# Altium PCB BridgeThing.PcbDoc
Units mm, origin at the board's own origin, x right, y up, seen from the top; angles counter-clockwise.
Board outline 65.45 x 56.45 mm, 2 copper layers (Top Layer, Bottom Layer); 62 components, 69 nets, 250 pads, 258 vias.
Unrouted connection lines stored in the file: 2.
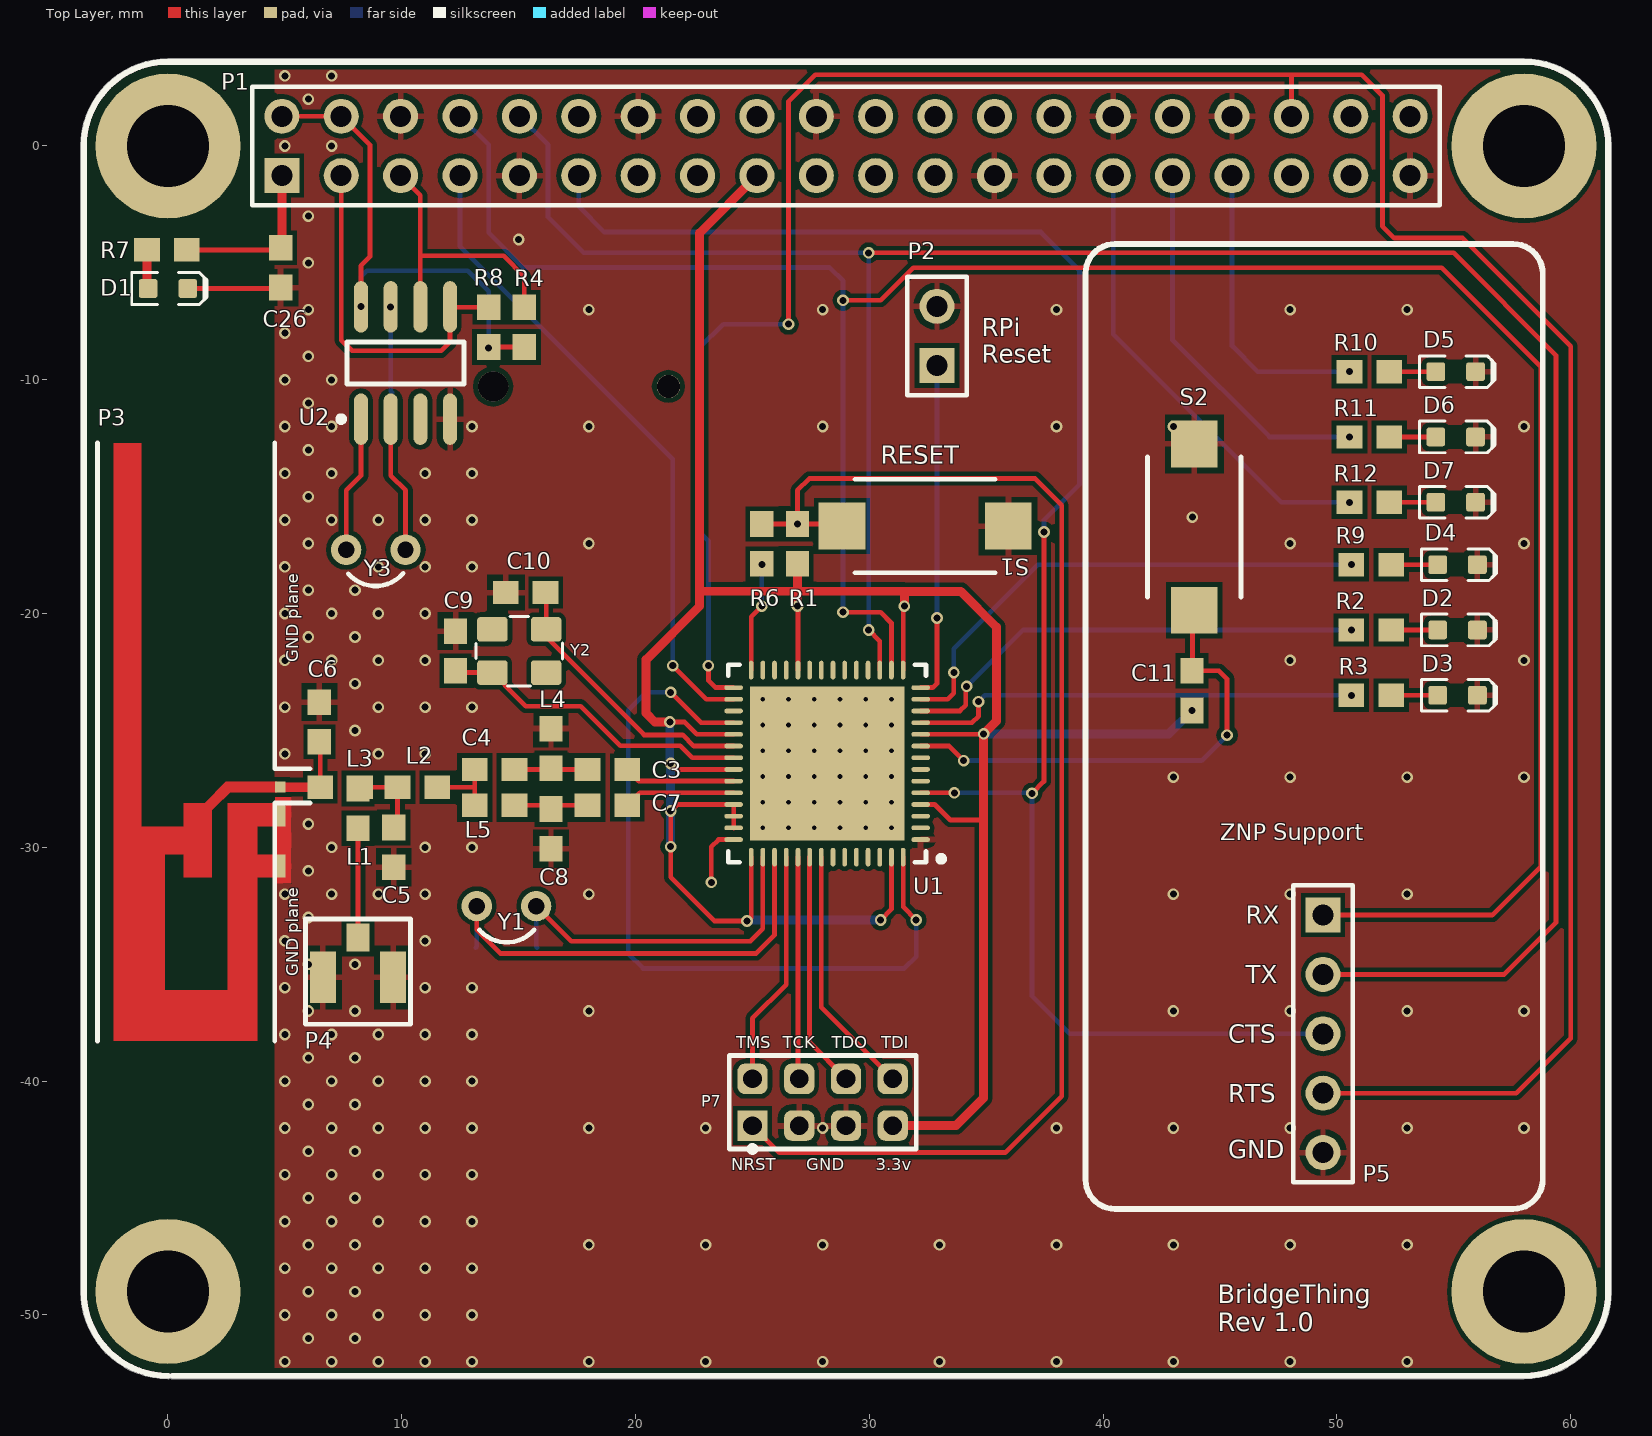
[diagram p0: Top Layer view]
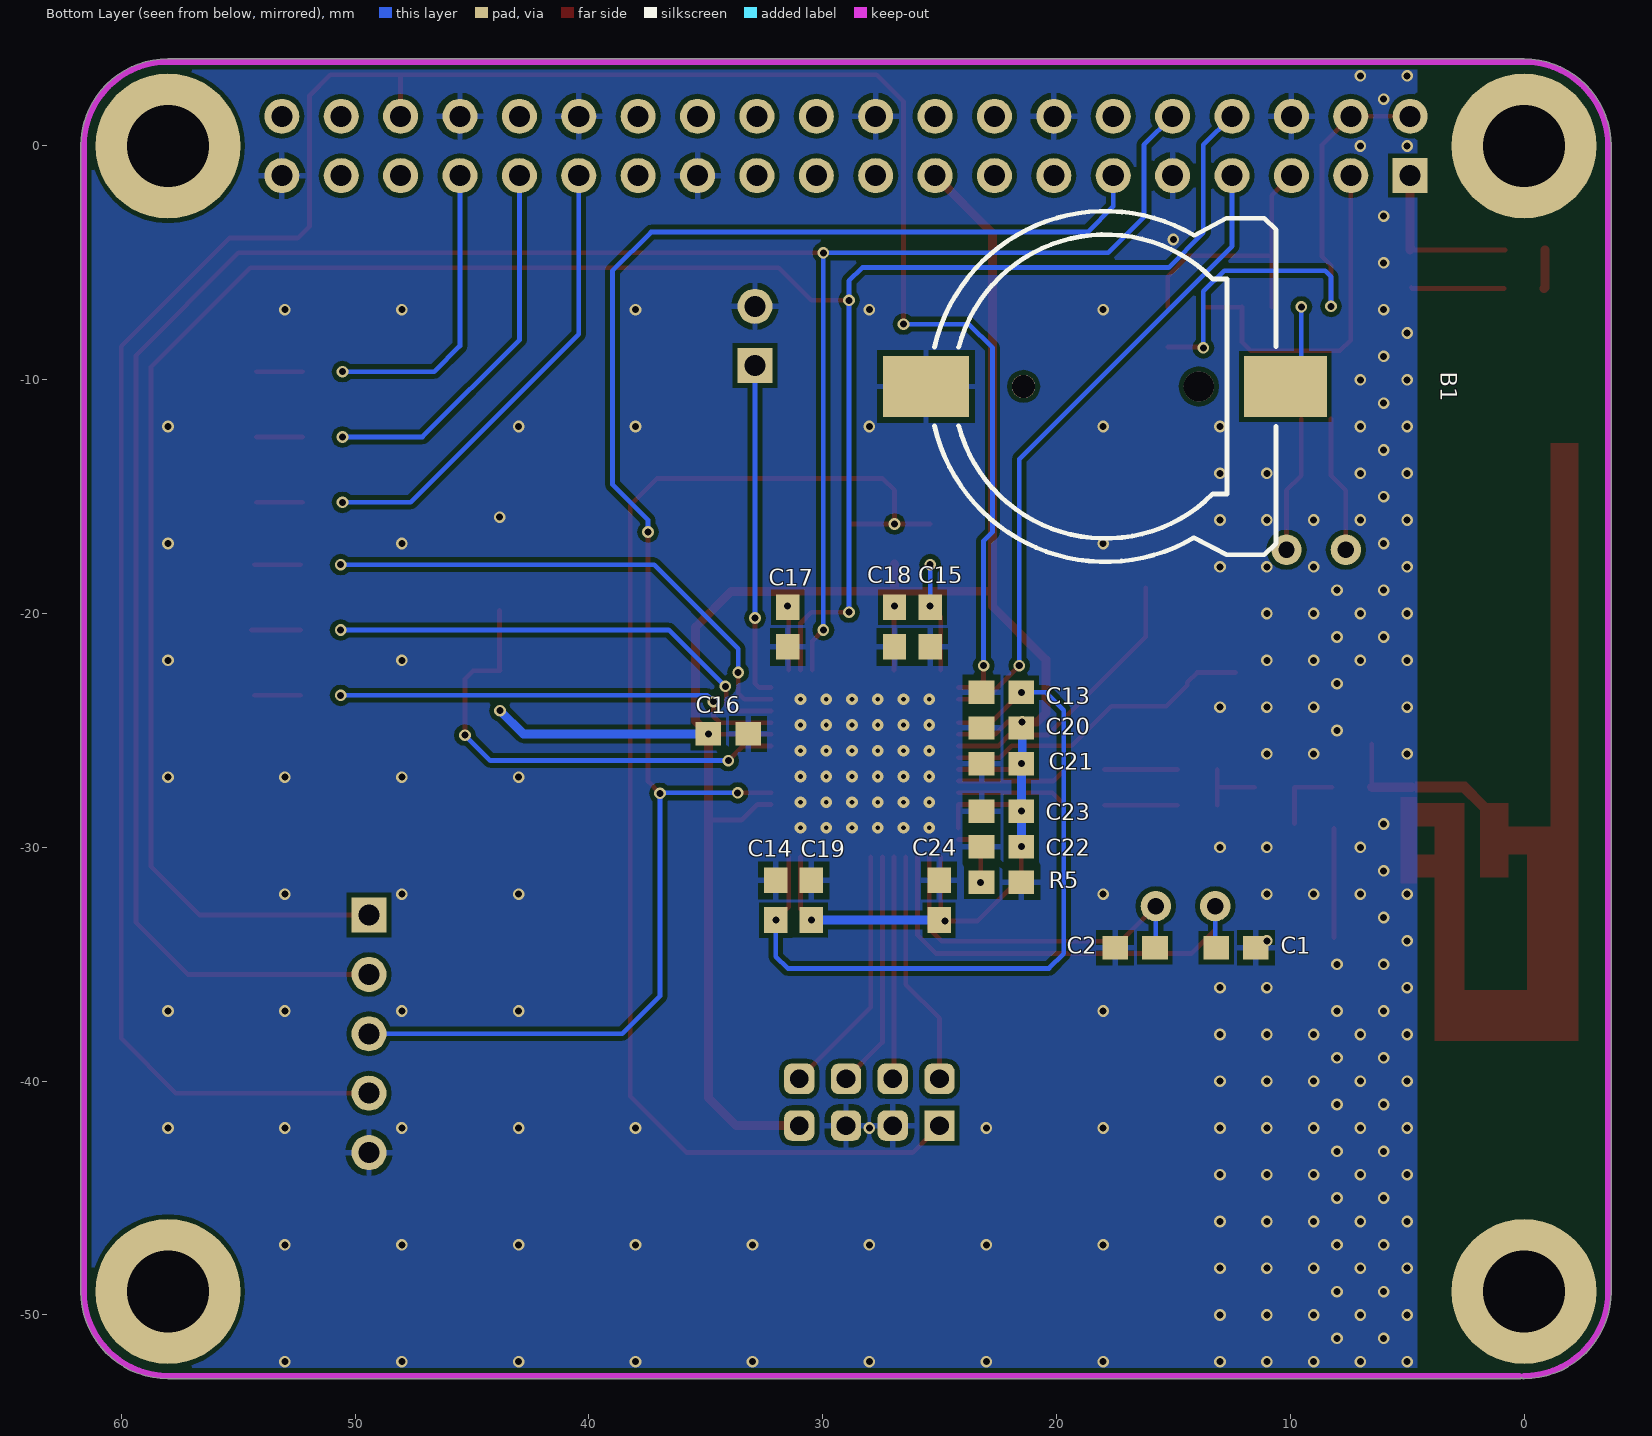
[diagram p1: Bottom Layer view, seen from below]

## Layer stack, top to bottom
Top Solder: solder mask 0.0102, Solder Resist, Dk 3.5
Top Layer: signal copper 0.0356
Dielectric 1: dielectric 0.32, FR-4, Dk 4.8
Bottom Layer: signal copper 0.0356
Bottom Solder: solder mask 0.0102, Solder Resist, Dk 3.5

## Board outline
-3.727,-49.001 cw(c-3.6,-49) -3.727,-49 -3.727,0 cw(c-3.6,0) -3.727,0.001 cw(c0,0) 0,3.727 58,3.727 cw(c58,0) 61.727,0.001 cw(c61.6,0) 61.727,0 61.727,-49 cw(c61.6,-49) 61.727,-49.001 ccw(c58,-49) 61.727,-49 ccw(c61.6,-49) 61.727,-49 61.727,-49.001 cw(c58,-49) 58,-52.727 0.201,-52.727 cw(c0.2,-52.6) 0.1,-52.679 ccw(c0,-52.6) 0.1,-52.679 cw(c0,-52.6) 0,-52.727 cw(c0,-49)

## Design rules (kind name [scope] priority, off if disabled: settings)
Clearance [All] p1: gap=0.2 ignorepadtopadclearanceinfootprint=FALSE except(0: Arc-Hole Track-Hole SMDPad-Hole THPad-Hole Via-Hole Fill-Hole Poly-Hole Region-Hole Text-Hole)
PolygonConnect PolygonConnect_IsVia [isvia] p1: connectstyle=Direct reliefconductorwidth=0.254 reliefentries=4 polygonreliefangle="90 Angle" airgapwidth=0.254
PolygonConnect [All] p2: connectstyle=Relief reliefconductorwidth=0.254 reliefentries=4 polygonreliefangle="90 Angle" airgapwidth=0.254
RoutingVias [All] p1: holewidth=0.711 width=1.27 viastyle="Through Hole" minholewidth=0.711 minwidth=1.27 maxholewidth=0.711 maxwidth=1.27
SolderMaskExpansion [All] p1: expansion=0.102
Width [All] p1: maxlimit=2.54 minlimit=0.127 preferedwidth=0.254
30 further rules are at their usual default settings.

## Components (designator, comment, footprint, x,y, rotation, side; value= is the part's Value field where it differs from the comment)
B1 "Coin Battery" "COIN BATTERY 1220" 17.907,-10.287 r180 bottom
C1 "Cap Semi" 1608[0603] 12.319,-34.29 r0 bottom value=12pF
C2 "Cap Semi" 1608[0603] 16.637,-34.29 r180 bottom value=12pF
C3 "Cap Semi" 1608[0603] 18.796,-26.67 r180 top value=18pF
C4 "Cap Semi" 1608[0603] 13.97,-26.67 r180 top value=1pF
C5 "Cap Semi" 1608[0603] 9.652,-29.999 r90 top value=1.2pF
C6 "Cap Semi" 1608[0603] 6.477,-24.638 r270 top value=DNM
C7 "Cap Semi" 1608[0603] 18.796,-28.194 r180 top value=18pF
C8 "Cap Semi" 1608[0603] 16.383,-29.21 r90 top value=1pF
C9 "Cap Semi" 1608[0603] 12.3,-21.6 r270 top value=12pF
C10 "Cap Semi" 1608[0603] 15.3,-19.1 r0 top value=12pF
C11 "Cap Semi" 1608[0603] 43.8,-23.3 r90 top value=1uF
C13 "Cap Semi" 1608[0603] 22.352,-23.368 r180 bottom value=1uF
C14 "Cap Semi" 1608[0603] 32.004,-32.258 r270 bottom value=1uF
C15 "Cap Semi" 1608[0603] 25.4,-20.574 r90 bottom value=1nF
C16 "Cap Semi" 1608[0603] 34.036,-25.146 r0 bottom value=100nF
C17 "Cap Semi" 1608[0603] 31.496,-20.574 r90 bottom value=100nF
C18 "Cap Semi" 1608[0603] 26.924,-20.574 r90 bottom value=100nF
C19 "Cap Semi" 1608[0603] 30.48,-32.258 r270 bottom value=1uF
C20 "Cap Semi" 1608[0603] 22.352,-24.892 r180 bottom value=100nF
C21 "Cap Semi" 1608[0603] 22.352,-26.416 r180 bottom value=100nF
C22 "Cap Semi" 1608[0603] 22.352,-29.972 r180 bottom value=100nF
C23 "Cap Semi" 1608[0603] 22.352,-28.448 r180 bottom value=220nF
C24 "Cap Semi" 1608[0603] 25.019,-32.258 r270 bottom value=100nF
C26 "Cap Semi" 1608[0603] 4.826,-5.207 r90 top value=DNM
D1 "LED" "LED 0603" 0,-6.096 r0 top
D2 "LED" "LED 0603" 55.157,-20.701 r0 top
D3 "LED" "LED 0603" 55.157,-23.495 r0 top
D4 "LED" "LED 0603" 55.157,-17.907 r0 top
D5 "LED" "LED 0603" 55.077,-9.652 r0 top
D6 "LED" "LED 0603" 55.077,-12.446 r0 top
D7 "LED" "LED 0603" 55.077,-15.24 r0 top
L1 "Res Semi" 1608[0603] 8.128,-28.332 r90 top value=TBD
L2 "Res Semi" 1608[0603] 10.668,-27.432 r0 top value=2nH
L3 "Res Semi" 1608[0603] 7.366,-27.432 r0 top value=3.3nH
L4 "Res Semi" 1608[0603] 16.383,-25.77 r270 top value=2nH
L5 "Res Semi" 1608[0603] 13.97,-28.194 r180 top value=2nH
P1 "Header 20X2" HDR2X20 4.87,-1.27 r0 top locked
P2 "Header 2" HDR1X2 32.893,-9.398 r90 top
P3 "2.4GHz PCB Antenna" "2.4 GHz Inverted F Antenna 1" 4.572,-38.278 r90 top
P4 "uFL" uFL 8.128,-35.56 r0 top
P5 "Header 5" HDR1X5 49.403,-32.893 r270 top
P7 "Header_2mm 4x2" "Header_2mm 4x2" 28,-40.9 r270 top
R1 "Res Semi" 1608[0603] 26.924,-17.018 r90 top value=56K
R2 "Res Semi" 1608[0603] 51.466,-20.701 r180 top value=1.5K
R3 "Res Semi" 1608[0603] 51.466,-23.495 r180 top value=1.5K
R4 "Res Semi" 1608[0603] 15.24,-7.747 r270 top value=1.5K
R5 "Res Semi" 1608[0603] 22.352,-31.496 r0 bottom value=56K
R6 "Res Semi" 1608[0603] 25.4,-17.018 r270 top value=2.2K
R7 "Res Semi" 1608[0603] -0.046,-4.445 r0 top value=1.5K
R8 "Res Semi" 1608[0603] 13.716,-7.747 r270 top value=1.5K
R9 "Res Semi" 1608[0603] 51.466,-17.907 r180 top value=1.5K
R10 "Res Semi" 1608[0603] 51.386,-9.652 r180 top value=1.5K
R11 "Res Semi" 1608[0603] 51.386,-12.446 r180 top value=1.5K
R12 "Res Semi" 1608[0603] 51.386,-15.24 r180 top value=1.5K
S1 "SW" "Switch SMD" 32.385,-16.256 r0 top
S2 "SW" "Switch SMD" 43.9,-16.3 r90 top
U1 "CC2538" PVQFN56-CC2538 28.194,-26.416 r180 top
U2 "DS1307Z" SOIC8N_N 10.16,-9.282 r90 top
Y1 "XTAL" R38 14.478,-32.512 r90 top
Y2 "Crystal" "Crystal 3225" 15.025,-21.6 r0 top
Y3 "XTAL" R38 8.89,-17.272 r270 top

## Footprints (in the part's own frame and the unit in brackets; to place one, negate y for a bottom-side part, rotate by r counter-clockwise, add the part's x,y. Pads: shape width x height; smd on the part's side, far side on the other; paste and mask are expansions set on the pad)
"2.4 GHz Inverted F Antenna 1" [mm]
  rect 1x0.46 smd: 1(7.48,-0.23) 1(9.68,-0.23)
  rect 0.46x0.46 smd: 2(10.86,-0.23)
  Top Layer region: 0.002,5.7 25.582,5.7 25.582,6.91 0.002,6.91
  Top Layer region: 0,4.7 8.08,4.7 8.08,5.8 0,5.8
  Top Layer region: 7.98,3.7 9.18,3.7 9.18,5.8 7.98,5.8
  Top Layer region: 6.98,2.69 10.18,2.69 10.18,3.9 6.98,3.9
  Top Layer region: 0,1.93 2.18,1.93 2.18,4.8 0,4.8
  Top Layer region: 0,0.742 10.18,0.742 10.18,2.032 0,2.032
  Top Layer region: 6.98,-0.1 7.98,-0.1 7.98,0.84 6.98,0.84
  Top Layer region: 9.18,-0.1 10.18,-0.1 10.18,0.84 9.18,0.84
  Top Layer region: 10.632,-0.1 11.092,-0.1 11.092,2.1 10.632,2.1
  Top Layer region: 10.765,1.775 11.09,2.1 10.175,3.015 9.85,2.69
  silkscreen extent 0,-1.5 25.58,7.59
1608[0603] [mm] "Chip Capacitor; Body 1.6 x 0.8 mm (LxW typ)"
  rect 1.1x1 smd: 1(-0.85,0) 2(0.85,0)
"COIN BATTERY 1220" [mm]
  rect 3.66x2.6 smd: 1(-7.67,0)
  rect 3.54x2.6 smd: 2(7.7,0)
  round 1 hole 1: 3(-3.5,0)
  round 1.3 hole 1.3: 4(4,0)
  silkscreen extent -7.31,-7.5 7.3,7.5, body extent -9.3,-7.49 9.24,7.49, height 4.2
"Crystal 3225" [mm]
  round 0.508 on Mech15: 0(-0.025,0)
  rrect25% 1.3x1.05 smd mask+0.075: 1(-1.15,-0.925) 2(1.15,0.925) NC(-1.15,0.925) NC(1.15,-0.925)
  silkscreen extent -1.85,-1.5 1.85,1.47, body extent -1.62,-1.25 1.58,1.25, height 0.81
HDR1X2 [mm] "Connector; Header; 2 Position"
  rect 1.5x1.5 hole 0.9: 1(0,0)
  round 1.5 hole 0.9: 2(2.54,0)
  silkscreen extent -1.27,-1.27 3.81,1.27
HDR1X5 [mm] "Connector; Header; 5 Position"
  rect 1.5x1.5 hole 0.9: 1(0,0)
  round 1.5 hole 0.9: 2(2.54,0) 3(5.08,0) 4(7.62,0) 5(10.16,0)
  silkscreen extent -1.27,-1.27 11.43,1.27
HDR2X20 [mm] "Connector; Header; 20x2 Position"
  rect 1.5x1.5 hole 0.9: 1(0,0)
  round 1.5 hole 0.9: 2(0,2.54) 3(2.54,0) 4(2.54,2.54) 5(5.08,0) 6(5.08,2.54) 7(7.62,0) 8(7.62,2.54) 9(10.16,0) 10(10.16,2.54) 11(12.7,0) 12(12.7,2.54) 13(15.24,0) 14(15.24,2.54) 15(17.78,0) 16(17.78,2.54) 17(20.32,0) 18(20.32,2.54) 19(22.86,0) 20(22.86,2.54) 21(25.4,0) 22(25.4,2.54) 23(27.94,0) 24(27.94,2.54) 25(30.48,0) 26(30.48,2.54) 27(33.02,0) 28(33.02,2.54) 29(35.56,0) 30(35.56,2.54) 31(38.1,0) 32(38.1,2.54) 33(40.64,0) 34(40.64,2.54) 35(43.18,0) 36(43.18,2.54) 37(45.72,0) 38(45.72,2.54) 39(48.26,0) 40(48.26,2.54)
  silkscreen extent -1.27,-1.27 49.53,3.81
"Header_2mm 4x2" [mm] "Header_2mm 4x2"
  rect 1.3x1.3 hole 0.8: 1(1,-3)
  rrect50% 1.3x1.3 hole 0.8: 2(-1,-3) 3(1,-1) 4(-1,-1) 5(1,1) 6(-1,1) 7(1,3) 8(-1,3)
  silkscreen extent -2,-4 2.12,4
"LED 0603" [mm]
  round 0.254 on Mech15: 0(0,0)
  rrect25% 0.8x0.8 smd: A(-0.85,0) K(0.85,0)
  Top Layer pour cut-out: -0.5,0.5 0.5,0.5 0.5,-0.5 -0.5,-0.5
  silkscreen extent -1.55,-0.67 1.68,0.67, body extent -0.8,-0.4 0.8,0.4, height 0.75
PVQFN56-CC2538 [mm] "QFN, 56-Leads, Body 8.00x8.00mm, Pitch 0.50mm, Thermal Pad 6.60x6.60mm, IPC Medium Density"
  oval 0.8x0.2 smd: 1(-4,3.25) 2(-4,2.75) 3(-4,2.25) 4(-4,1.75) 5(-4,1.25) 6(-4,0.75) 7(-4,0.25) 8(-4,-0.25) 9(-4,-0.75) 10(-4,-1.25) 11(-4,-1.75) 12(-4,-2.25) 13(-4,-2.75) 14(-4,-3.25) 29(4,-3.25) 30(4,-2.75) 31(4,-2.25) 32(4,-1.75) 33(4,-1.25) 34(4,-0.75) 35(4,-0.25) 36(4,0.25) 37(4,0.75) 38(4,1.25) 39(4,1.75) 40(4,2.25) 41(4,2.75) 42(4,3.25)
  oval 0.2x0.8 smd: 15(-3.25,-4) 16(-2.75,-4) 17(-2.25,-4) 18(-1.75,-4) 19(-1.25,-4) 20(-0.75,-4) 21(-0.25,-4) 22(0.25,-4) 23(0.75,-4) 24(1.25,-4) 25(1.75,-4) 26(2.25,-4) 27(2.75,-4) 28(3.25,-4) 43(3.25,4) 44(2.75,4) 45(2.25,4) 46(1.75,4) 47(1.25,4) 48(0.75,4) 49(0.25,4) 50(-0.25,4) 51(-0.75,4) 52(-1.25,4) 53(-1.75,4) 54(-2.25,4) 55(-2.75,4) 56(-3.25,4)
  rect 6.6x6.6 smd: 57(0,0)
  silkscreen extent -5,-4.23 4.23,4.23, body extent -4.08,-4.08 4.08,4.08, height 0.8
R38 [mm] "Crystal, Thru-Hole; 2 Leads; Body 3.1 x 8.2 mm (Dia.xH)"
  round 1.3 hole 0.7: 1(0,1.27) 2(0,-1.27)
  silkscreen extent -1.55,-1.19 -1.01,1.16
SOIC8N_N [mm] "SOIC, 8-Leads, Body 4.9x3.9mm, Pitch 1.27mm, IPC Medium Density"
  oval 2.2x0.6 smd: 1(-2.4,1.905) 2(-2.4,0.635) 3(-2.4,-0.635) 4(-2.4,-1.905) 5(2.4,-1.905) 6(2.4,-0.635) 7(2.4,0.635) 8(2.4,1.905)
  silkscreen extent -2.52,-2.5 0.9,2.88, body extent -2,-2.5 2,2.5, height 1.75
"Switch SMD" [mm]
  rect 2x2 smd: 1(3.556,0) 2(-3.556,0)
  silkscreen extent -3,-2 3,2, body extent -3,-2 3,2, height 2.5
uFL [mm]
  rect 1x1.2 smd: 1(0,1.7)
  rect 1.1x2.2 smd: 2(-1.5,0) 2(1.5,0)
  silkscreen extent -2.25,-2 2.25,2.5

## Part data
C1 C2 C3 C4 C5 C6 C7 C8 C9 C10 C11 C13 C14 C15 C16 C17 C18 C19 C20 C21 C22 C23 C24 C26: "Capacitor (Semiconductor SIM Model)", LatestRevisionDate=17-Jul-2002, LatestRevisionNote="Re-released for DXP Platform.", PackageReference=C1206, Published=8-Jun-2000, Publisher="Altium Limited"
D1 D2 D3 D4 D5 D6 D7: library part "LED SMD", "LED SMD"
L1 L2 L3 L4 L5 R1 R2 R3 R4 R5 R6 R7 R8 R9 R10 R11 R12: "Semiconductor Resistor", LatestRevisionDate=17-Jul-2002, LatestRevisionNote="Re-released for DXP Platform.", PackageReference=AXIAL-0.5, Published=8-Jun-2000, Publisher="Altium Limited"
P1: "Header, 20-Pin, Dual row", LatestRevisionDate=17-Jul-2002, LatestRevisionNote="Re-released for DXP Platform.", Publisher="Altium Limited"
P2: "Header, 2-Pin", LatestRevisionDate=17-Jul-2002, LatestRevisionNote="Re-released for DXP Platform.", Publisher="Altium Limited"
P5: "Header, 5-Pin", LatestRevisionDate=17-Jul-2002, LatestRevisionNote="Re-released for DXP Platform.", Publisher="Altium Limited"
S1 S2: library part "Switch SMD"
U2: "64 X 8 Serial Real-Time Clock", Code_IPC=SOIC127P600-8, ComponentLink1Description="Manufacturer Link", ComponentLink1URL=http://www.maxim-ic.com/, ComponentLink2Description=Datasheet, ComponentLink2URL=http://pdfserv.maxim-ic.com/en/ds/DS1307.pdf, ComponentLink3Description="Discontinuation Notice", ComponentLink3URL=http://www.maxim-ic.com/qa/pdfs/non-obsolescence-letter.pdf, DatasheetVersion=10-Aug-1999, LatestRevisionDate=13-Apr-2006, LatestRevisionNote="IPC-7351 Footprint Added.", PackageDescription="8-Pin Small Outline Integrated Circuit 1.27 mm Pitch", PackageReference=SOIC8N, PackageVersion=1999, Published=13-Oct-2000, Publisher="Altium Limited"
Y1 Y3: "Crystal Oscillator", LatestRevisionDate=17-Jul-2002, LatestRevisionNote="Re-released for DXP Platform.", PackageReference=R38, Published=8-Jun-2000, Publisher="Altium Limited"
Y2: library part Xtal

## Free pads (board coordinates)
  round 6.2 hole 3.5: 0(0,-49) 0(0,0) 0(58,-49) 0(58,0)

## Via types
v1: diameter 0.5, hole 0.3, Top Layer to Bottom Layer, tented both sides, 222 vias
v2: diameter 0.5, hole 0.2, Top Layer to Bottom Layer, tented both sides, 36 vias

## Nets (pads, with @x,y where several pads share a name; then routed paths per layer and width w, separated by ;. In a path a pad name is that pad's centre, name@x,y a point inside that pad or via, vN(x,y) a via of type N, cw(c..) or ccw(c..) an arc to the next point about the centre after c; other vN are vias at no path point)
32K_Q1: C2.2 U1.44 Y1.2 | length 15.4
  Top Layer w0.203: Y1.2 17.25,-34.014 24.914,-34.014 25.444,-33.484 U1.44
  Bottom Layer w0.203: Y1.2 15.748,-34.251 C2.2
32K_Q2: C1.2 U1.45 Y1.1 | length 19.6
  Top Layer w0.203: Y1.1 13.208,-33.528 14.224,-34.544 25.146,-34.544 25.944,-33.746 U1.45
  Bottom Layer w0.203: C1.2 13.208,-34.251 Y1.1
32M_Q1: C10.2 U1.34 Y2.2 | length 12.1
  Top Layer w0.203: C10.2@16.175,-18.9 Y2.2 16.175,-21 20.364,-25.19 22.015,-25.19 22.491,-25.666 U1.34
32M_Q2: C9.2 U1.35 Y2.1 | length 13.4
  Top Layer w0.203: C9.2@12.325,-22.525 Y2.1 13.984,-22.525 14.405,-22.946 14.405,-23.055 15.31,-23.96 17.66,-23.96 19.354,-25.654 21.909,-25.654 22.421,-26.166 U1.35
+3.3: C11.1 C16.2 C17.2 C18.2 C19.2 C20.2 C21.2 C22.2 C23.2 C24.2 C26.2 P1.1 P1.17 P7.7 R1.1 R7.2 U1.4 U1.10 U1.15 U1.24 U1.33 U1.36 U1.39 U1.40 U1.41 U1.43 U1.55 | length 127.4
  Top Layer w0.203: R7.2 C26.2@4.87,-4.445 ; v1(21.463,-24.638) 22.098,-24.638 22.626,-25.166 U1.33 ; v1(21.502,-26.416) 21.752,-26.666 U1.36 ; U1.41 U1.40 U1.39 21.784,-28.166 v1(21.502,-28.448) v1(21.502,-29.972) 21.502,-31.281 23.368,-33.147 v1(24.765,-33.147) ; v1@24.944,-33.033 U1.43 ; v1(26.924,-19.685) 26.944,-19.705 U1.24 ; v1(30.48,-33.108) 30.944,-32.644 U1.55 ; U1.15 31.444,-19.737 v1(31.496,-19.685) ; U1.4 32.8,-28.166 33.463,-28.829 34.886,-28.829 ; U1.10 v1@34.886,-25.166
  Top Layer w0.381: C26.2 C26.2@4.87,-4.357 ; C26.2@4.87,-4.445 C26.2@4.87,-4.357 ; P1.1 C26.2@4.87,-4.357 ; v1(21.463,-24.638) 20.828,-24.638 20.447,-24.257 20.447,-21.971 22.733,-19.685 22.733,-19.045 ; P1.17 22.733,-3.727 22.733,-19.045 ; v1(26.924,-19.685) 26.924,-19.045 ; R1.1 26.924,-19.045 ; P7.7 33.7,-41.9 34.886,-40.714 34.886,-28.829 34.886,-25.166 v1(34.886,-25.146) 35.433,-24.599 35.433,-20.574 33.909,-19.05 31.496,-19.05 ; v1(31.496,-19.685) 31.496,-19.05 ; 22.733,-19.045 26.924,-19.045 ; 26.924,-19.045 31.496,-19.045 31.496,-19.05
  Bottom Layer w0.381: v1(21.463,-24.638) 21.463,-26.377 v1(21.502,-26.416) v1(21.502,-28.448) v1(21.502,-29.972) ; v1(24.765,-33.147) 24.804,-33.108 v1(30.48,-33.108) ; v1(34.886,-25.146) 42.804,-25.146 v1(43.8,-24.15)
+5: P1.2 P1.4 R4.2 R8.2 U2.8 | length 22.5
  Top Layer w0.203: P1.2 P1.4 8.636,0.044 8.636,-4.738 8.255,-5.119 U2.8 ; v1(13.716,-8.636) 13.755,-8.597 R4.2
  Bottom Layer w0.203: v1(8.255,-6.858) 8.255,-5.588 8.509,-5.334 12.827,-5.334 13.716,-6.223 v1(13.716,-8.636)
BAT: U2.3
BCM5: P1.29 R12.2 | length 19.9
  Bottom Layer w0.203: P1.29 40.43,-8.045 47.625,-15.24 v1(50.536,-15.24)
BCM6: P1.31 R11.2 | length 16.3
  Bottom Layer w0.203: P1.31 42.97,-8.299 47.117,-12.446 v1(50.536,-12.446)
BCM13: P1.33 R10.2 | length 12.8
  Bottom Layer w0.203: P1.33 45.51,-8.553 46.609,-9.652 v1(50.536,-9.652)
CTS: P1.11 P5.3 U1.5 | length 73.6
  Top Layer w0.203: U1.5 v1(33.635,-27.666) ; v1(36.957,-27.686) 37.465,-27.178 v1(37.465,-16.51)
  Bottom Layer w0.203: P1.11 17.57,-2.584 18.669,-3.683 37.338,-3.683 38.989,-5.334 38.989,-14.478 37.465,-16.002 v1(37.465,-16.51) ; v1(33.635,-27.666) v1@36.957,-27.666 ; v1(36.957,-27.686) 36.957,-36.357 38.573,-37.973 P5.3
D+: U1.2
D-: U1.3
GND: B1.1 C1.1 C2.1 C5.1 C6.1 C8.1 C9.1 C10.1 C13.1 C14.1 C15.1 C16.1 C17.1 C18.1 C19.1 C20.1 C21.1 C22.1 C23.1 C24.1 C26.1 D1.K D2.K D3.K D4.K D5.K D6.K D7.K L4.1 P1.6 P1.9 P1.14 P1.20 P1.25 P1.30 P1.34 P1.39 P2.2 P3.1 P4.2 P5.5 P7.3 P7.5 R5.1 S1.1 S2.1 U1.1 U1.57 U2.4 | length 4
  Top Layer w0.203: D1.K 4.787,-6.096 C26.1
  other v1: 5,-52 7,-52 9,-52 11,-52 13,-52 18,-52 23,-52 28,-52 33,-52 38,-52 43,-52 48,-52 53,-52 6,-51 8,-51 5,-50 7,-50 9,-50 11,-50 13,-50 6,-49 8,-49 5,-48 7,-48 9,-48 11,-48 13,-48 6,-47 8,-47 18,-47 23,-47 28,-47 33,-47 38,-47 43,-47 48,-47 53,-47 5,-46 7,-46 9,-46 11,-46 13,-46 6,-45 8,-45 5,-44 7,-44 9,-44 11,-44 13,-44 6,-43 8,-43 5,-42 7,-42 9,-42 11,-42 13,-42 18,-42 23,-42 28,-42 38,-42 43,-42 48,-42 53,-42 58,-42 6,-41 8,-41 5,-40 7,-40 9,-40 11,-40 13,-40 6,-39 8,-39 5,-38 7,-38 9,-38 11,-38 13,-38 6,-37 8,-37 18,-37 43,-37 48,-37 53,-37 58,-37 5,-36 11,-36 13,-36 6,-35 8,-35 5,-34 11,-34 6,-33 5,-32 7,-32 9,-32 11,-32 18,-32 43,-32 48,-32 53,-32 6,-31 7,-30 11,-30 13,-30 6,-29 43,-27 48,-27 53,-27 58,-27 5,-26 9,-26 11,-26 8,-25 5,-24 9,-24 11,-24 13,-24 8,-23 5,-22 7,-22 9,-22 11,-22 48,-22 58,-22 6,-21 8,-21 5,-20 7,-20 9,-20 11,-20 6,-19 8,-19 5,-18 9,-18 11,-18 13,-18 6,-17 18,-17 48,-17 58,-17 5,-16 7,-16 9,-16 11,-16 13,-16 43.815,-15.875 6,-15 5,-14 7,-14 11,-14 13,-14 6,-13 5,-12 7,-12 13,-12 13,-12 18,-12 28,-12 38,-12 43,-12 58,-12 6,-11 5,-10 7,-10 6,-9 5,-8 6,-7 18,-7 28,-7 38,-7 48,-7 53,-7 6,-5 15,-4 6,-3 5,0 7,0 6,2 5,3 7,3
  other v2: 25.444,-29.166 26.544,-29.166 27.644,-29.166 28.744,-29.166 29.844,-29.166 30.944,-29.166 25.444,-28.066 26.544,-28.066 27.644,-28.066 28.744,-28.066 29.844,-28.066 30.944,-28.066 25.444,-26.966 26.544,-26.966 27.644,-26.966 28.744,-26.966 29.844,-26.966 30.944,-26.966 25.444,-25.866 26.544,-25.866 27.644,-25.866 28.744,-25.866 29.844,-25.866 30.944,-25.866 25.444,-24.766 26.544,-24.766 27.644,-24.766 28.744,-24.766 29.844,-24.766 30.944,-24.766 25.444,-23.666 26.544,-23.666 27.644,-23.666 28.744,-23.666 29.844,-23.666 30.944,-23.666
NetB1_2: B1.2 U2.7 | length 3.7
  Bottom Layer w0.203: v1(9.525,-6.882) 9.525,-10.489 B1.2@9.577,-10.541
NetC3_1: C3.1 U1.37 | length 4.8
  Top Layer w0.203: C3.1 20.142,-27.166 U1.37
NetC3_2: C3.2 C4.1 L4.2 | length 3.1
  Top Layer w0.203: C4.1 C3.2
NetC4_2: C4.2 L2.2 L5.2 | length 3.1
  Top Layer w0.203: L2.2 13.12,-27.432 ; L5.2 13.12,-27.432 ; C4.2 13.12,-27.432
NetC5_2: C5.2 L1.2 L2.1 L3.2 | length 3.2
  Top Layer w0.203: L3.2 L2.1 C5.2@9.818,-28.983
NetC6_2: C6.2 L3.1 P3.2 | length 3.6
  Top Layer w0.203: L3.1 C6.2@6.516,-25.576
  Top Layer w0.406: P3.2 6.502,-27.418 L3.1
NetC7_1: C7.1 U1.38 | length 4.8
  Top Layer w0.203: C7.1 20.174,-27.666 U1.38
NetC7_2: C7.2 C8.2 L5.1 | length 3.1
  Top Layer w0.203: L5.1 C7.2
NetC13_2: C13.2 C14.2 U1.32 U1.56 | length 33.1
  Top Layer w0.203: v1(21.502,-23.368) 22.8,-24.666 U1.32 ; U1.56 31.444,-32.548 v1(32.004,-33.108)
  Bottom Layer w0.203: v1(21.502,-23.368) 20.447,-23.368 19.685,-24.13 19.685,-34.544 20.32,-35.179 31.496,-35.179 32.004,-34.671 v1(32.004,-33.108)
NetC15_2: C15.2 R6.2 U1.28 | length 4.7
  Top Layer w0.203: U1.28 24.944,-20.141 v1(25.4,-19.685)
  Bottom Layer w0.203: v1(25.4,-19.685) v1(25.4,-17.907)
NetD1_A: D1.A R7.1 | length 1.7
  Top Layer w0.381: R7.1 -0.896,-6.05 D1.A
NetD2_A: D2.A R2.1 | length 2.1
  Top Layer w0.203: R2.1 D2.A@54.434,-20.701
NetD3_A: D3.A R3.1 | length 2
  Top Layer w0.203: R3.1 D3.A
NetD4_A: D4.A R9.1 | length 2
  Top Layer w0.203: R9.1 D4.A
NetD5_A: D5.A R10.1 | length 2
  Top Layer w0.203: R10.1 D5.A
NetD6_A: D6.A R11.1 | length 2
  Top Layer w0.203: R11.1 D6.A
NetD7_A: D7.A R12.1 | length 2
  Top Layer w0.203: R12.1 D7.A
NetL1_1: L1.1 P4.1 | length 4.7
  Top Layer w0.203: P4.1 L1.1
NetR5_2: R5.2 U1.42 | length 2.6
  Top Layer w0.203: v1(23.241,-31.496) 23.241,-29.972 23.547,-29.666 U1.42
NetU2_1: U2.1 Y3.2 | length 5.9
  Top Layer w0.203: Y3.2 7.62,-14.732 8.255,-14.097 U2.1
NetU2_2: U2.2 Y3.1 | length 5.9
  Top Layer w0.203: U2.2 9.525,-14.097 10.16,-14.732 Y3.1
PA0: P1.8 P5.1 U1.16 | length 103.7
  Top Layer w0.203: v1(28.873,-19.939) 30.48,-19.939 30.944,-20.403 U1.16 ; v1(28.873,-6.6) 30.484,-6.6 31.877,-5.207 54.483,-5.207 58.73,-9.454 58.73,-30.805 56.642,-32.893 P5.1
  Bottom Layer w0.203: P1.8 13.716,0.044 13.716,-3.716 15.2,-5.2 28.3,-5.2 28.873,-5.773 v1(28.873,-6.6) v1(28.873,-19.939)
PA1: P1.10 P5.2 U1.17 | length 103.6
  Top Layer w0.203: v1(29.972,-20.701) 30.444,-21.173 U1.17 ; v1(29.972,-4.572) 54.991,-4.572 59.365,-8.946 59.365,-33.218 57.15,-35.433 P5.2
  Bottom Layer w0.203: P1.10 16.256,0.044 16.256,-3.048 17.78,-4.572 v1(29.972,-4.572) v1(29.972,-20.701)
PA2: U1.18
PA3: U1.19
PA4: U1.20
PA5: U1.21
PA6: U1.22
PA7: U1.23
PB1: U1.54
PB2: U1.53
PB3: U1.52
PB4: U1.51
PB5: U1.50
PB6: P7.8 U1.49 | length 10.7
  Top Layer w0.203: U1.49 27.944,-36.844 P7.8
PB7: P7.6 U1.48 | length 10.1
  Top Layer w0.203: U1.48 27.444,-38.344 P7.6
PC0: P2.1 U1.14 | length 14.4
  Top Layer w0.203: U1.14 32.714,-23.166 32.893,-22.987 v1(32.893,-20.193)
  Bottom Layer w0.203: v1(32.893,-20.193) P2.1
PC1: R9.2 U1.13 | length 21.9
  Top Layer w0.203: U1.13 33.357,-23.666 33.611,-23.412 v1(33.611,-22.523)
  Bottom Layer w0.203: v1(33.611,-22.523) 33.611,-21.507 37.211,-17.907 v1(50.616,-17.907)
PC2: R2.2 U1.12 | length 20.3
  Top Layer w0.203: U1.12 33.873,-24.166 34.119,-23.92 34.119,-23.158 v1(34.163,-23.114)
  Bottom Layer w0.203: v1(34.163,-23.114) 36.576,-20.701 v1(50.616,-20.701)
PC3: R3.2 U1.11 | length 19.3
  Top Layer w0.203: U1.11 34.389,-24.666 34.671,-24.384 v1(34.671,-23.766)
  Bottom Layer w0.203: v1(34.671,-23.766) 34.942,-23.495 v1(50.616,-23.495)
PC4: C11.2 S2.2 U1.9 | length 20.5
  Top Layer w0.203: U1.9 33.413,-25.666 v1(34.036,-26.289) ; C11.2 C11.2@43.815,-22.45 ; S2.2@43.815,-19.856 C11.2@43.815,-22.45 ; v1(45.3,-25.2) 45.3,-22.8 44.95,-22.45 C11.2@43.815,-22.45
  Bottom Layer w0.203: v1(34.036,-26.289) 44.211,-26.289 v1(45.3,-25.2)
PC5: U1.8
PC6: U1.7
PC7: U1.6
PD0: U1.25
PD1: U1.26
PD2: U1.27
PD3: P1.36 P5.4 U1.29 | length 114.3
  Top Layer w0.203: v1(23.114,-22.225) 23.114,-22.86 23.42,-23.166 U1.29 ; v1(26.543,-7.62) 26.543,1.905 27.686,3.048 48.05,3.048 ; P1.36 48.05,3.048 ; P5.4 57.658,-40.513 60,-38.171 60,-8.565 55.372,-3.937 52.451,-3.937 51.943,-3.429 51.943,2.159 51.054,3.048 48.05,3.048
  Bottom Layer w0.203: v1(23.114,-22.225) 23.114,-16.891 22.733,-16.51 22.733,-8.636 23.749,-7.62 v1(26.543,-7.62)
PD4: P1.7 U1.30 | length 27.9
  Top Layer w0.203: v1(21.59,-22.225) 23.031,-23.666 U1.30
  Bottom Layer w0.203: P1.7 12.49,-4.289 21.59,-13.389 v1(21.59,-22.225)
PD5: U1.31
RESET: P7.1 R1.2 R6.1 S1.2 | length 56.7
  Top Layer w0.203: P7.1 26.153,-43.053 35.814,-43.053 38.227,-40.64 38.227,-15.367 37.084,-14.224 27.432,-14.224 26.924,-14.732 v1(26.924,-16.168) ; R6.1 v1(26.924,-16.168) ; S1.2@28.741,-16.168 v1(26.924,-16.168)
SCL: P1.5 R4.1 U2.6 | length 12.1
  Top Layer w0.203: P1.5 10.795,-2.115 10.795,-4.699 ; U2.6 10.795,-4.699 ; R4.1 15.24,-5.588 14.351,-4.699 10.795,-4.699
SDA: P1.3 R8.1 U2.5 | length 15.2
  Top Layer w0.203: P1.3 7.41,-8.299 7.874,-8.763 11.684,-8.763 12.065,-8.382 U2.5 12.08,-6.897 R8.1
TCK: P7.4 U1.47 | length 9.5
  Top Layer w0.203: P7.4@26.944,-39.9 U1.47
TMS: P7.2 U1.46 | length 10.1
  Top Layer w0.203: P7.2 25,-37.315 26.444,-35.871 U1.46
pads on no net: B1.3 B1.4 D1.0 D2.0 D3.0 D4.0 D5.0 D6.0 D7.0 P1.12 P1.13 P1.15 P1.16 P1.18 P1.19 P1.21 P1.22 P1.23 P1.24 P1.26 P1.27 P1.28 P1.32 P1.35 P1.37 P1.38 P1.40 Y2.0 Y2.NC

## Polygon pours and split planes (outlines as drawn)
GND on Bottom Layer "Bottom Layer-No Net" (solid, remove dead copper, pour order 6): 4.572,-12.954 4.572,3.6 17.907,3.6 61.6,3.6 61.6,-45.339 61.6,-52.6 24.765,-52.6 4.572,-52.6 4.572,-12.7
GND on Top Layer "Bottom Layer-No Net" (solid, remove dead copper, pour order 8): 4.572,-12.954 4.572,3.6 17.907,3.6 61.6,3.6 61.6,-45.339 61.6,-52.6 24.765,-52.6 4.572,-52.6 4.572,-12.7

## Keep-outs
Keep-Out Layer:
  lines w0.254: 0,-52.6 cw(c0,-49) -3.6,-49 -3.6,0 cw(c0,0) 0,3.6 58,3.6 cw(c58,0) 61.6,0 61.6,-49 cw(c58,-49) 58,-52.6 0.2,-52.6 ; 0.2,-52.6 0.2,-52.6

## Other copper
Top Layer:
  rectangle net GND: 4.572,-31.552 5.286,-27.85

## Silkscreen, mask and mechanical layers (free items; w line width, h text height)
Top Overlay:
  lines w0.254: 0,-52.6 cw(c0,-49) -3.6,-49 -3.6,0 cw(c0,0) 0,3.6 58,3.6 cw(c58,0) 61.6,0 61.6,-49 cw(c58,-49) 58,-52.6 0.2,-52.6 ; 0.2,-52.6 0.2,-52.6 ; 39.243,-44.196 ccw(c40.513,-44.196) 40.513,-45.466 57.531,-45.466 ccw(c57.531,-44.196) 58.801,-44.196 58.801,-5.461 ccw(c57.531,-5.461) 57.531,-4.191 40.513,-4.191 ccw(c40.513,-5.461) 39.243,-5.461 39.243,-44.196
  text "RPi" at 34.798,-8.128 h0.76
  text "Reset" at 34.798,-9.271 h0.76
  text "RESET" at 30.48,-13.589 h0.76
  text "ZNP Support" at 45,-29.7 h0.7
  text "RX" at 46.101,-33.274 h0.76
  text "TX" at 46.101,-35.814 h0.76
  text "CTS" at 45.339,-38.354 h0.76
  text "TMS" at 24.3,-38.6 h0.51
  text "TCK" at 26.3,-38.6 h0.51
  text "TDO" at 28.4,-38.6 h0.51
  text "TDI" at 30.5,-38.6 h0.51
  text "RTS" at 45.339,-40.894 h0.76
  text "GND" at 45.339,-43.307 h0.76
  text "NRST" at 24.1,-43.8 h0.51
  text "GND" at 27.3,-43.8 h0.51
  text "3.3v" at 30.27,-43.8 h0.51
  text "BridgeThing  / Rev 1.0" at 44.9,-50.7 h0.8

## Text inside footprints (layer, text, board x,y; h text height)
P3: Top Overlay "GND plane" at 5.562,-22.088 h0.51 r90; Top Overlay "GND plane" at 5.562,-35.508 h0.51 r90